# Altium PCB PCBRelais.PcbDoc
Units mil, origin at the board's own origin, x right, y up, seen from the top; angles counter-clockwise.
Board outline 6330 x 8490 mil, 2 copper layers (Top Layer, Bottom Layer), stack 21 mil thick; 27 components, 55 nets, 124 pads, 4 vias.
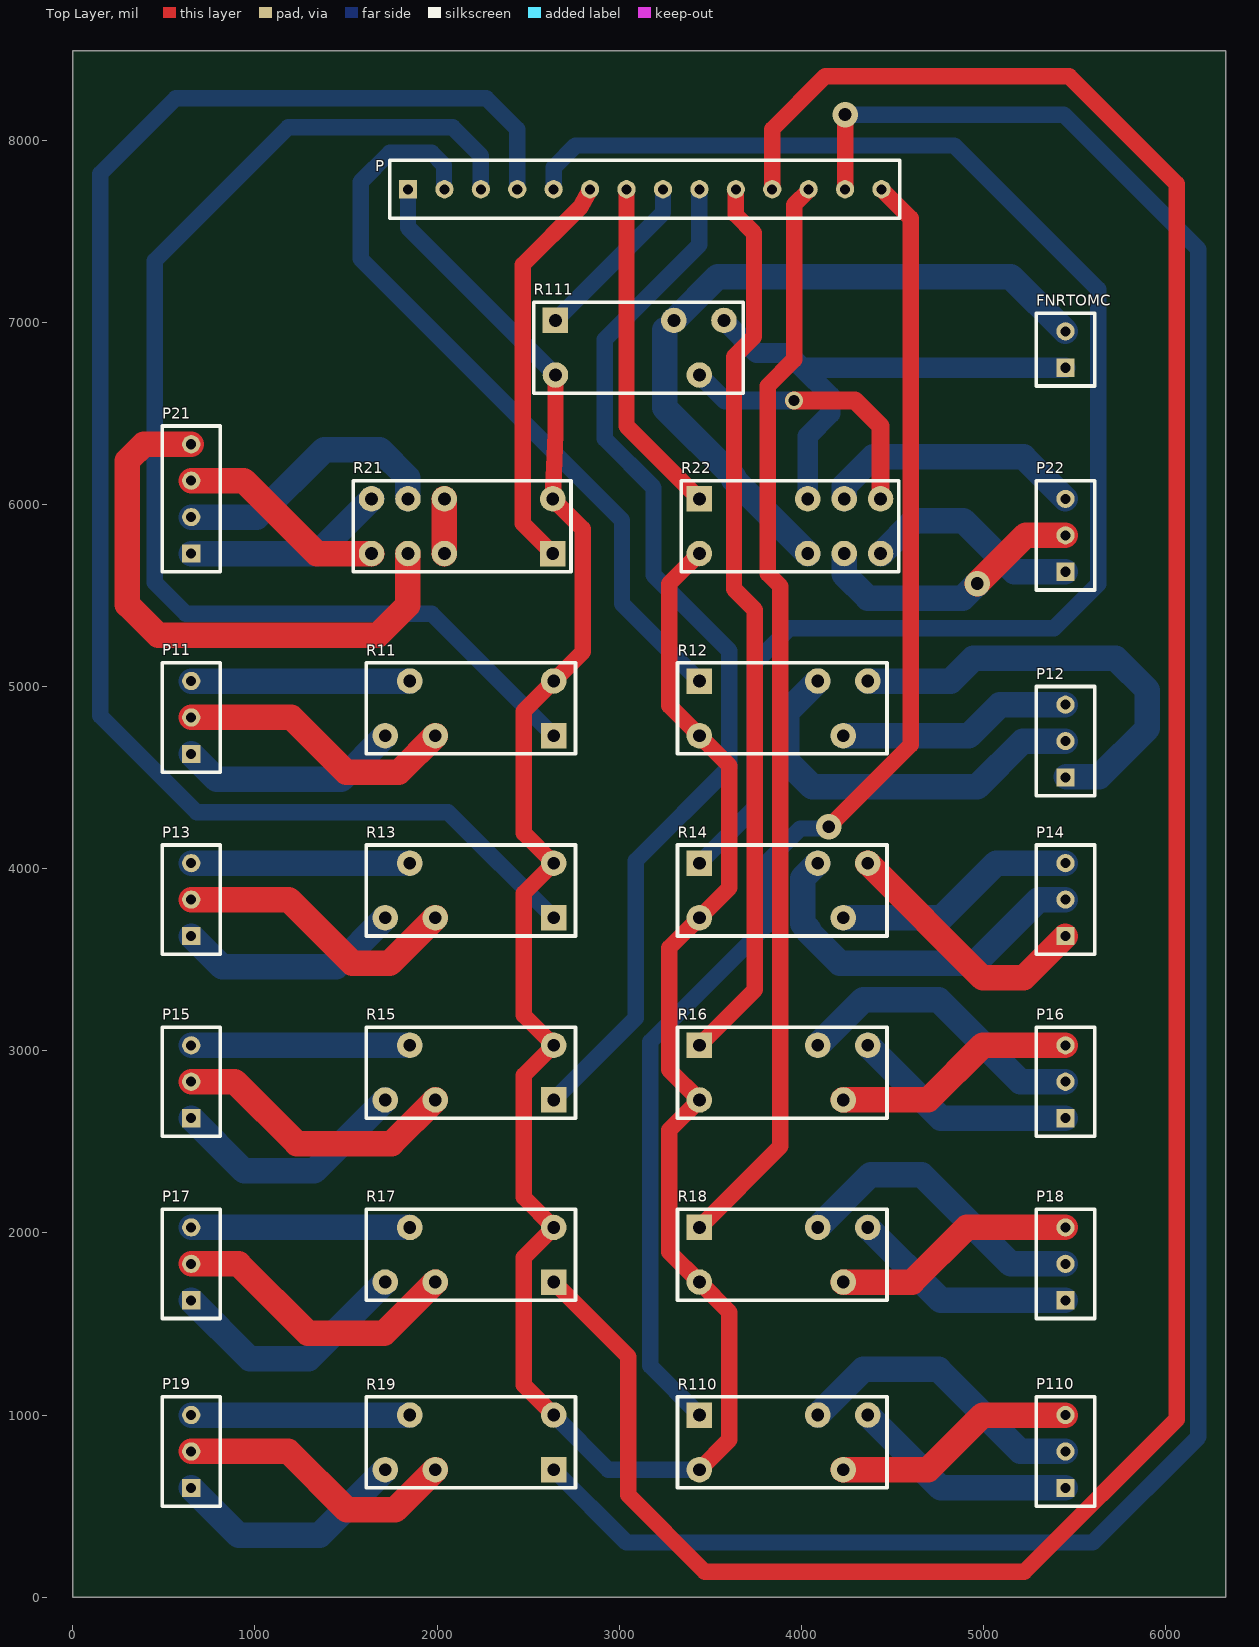
[diagram p0: Top Layer view]
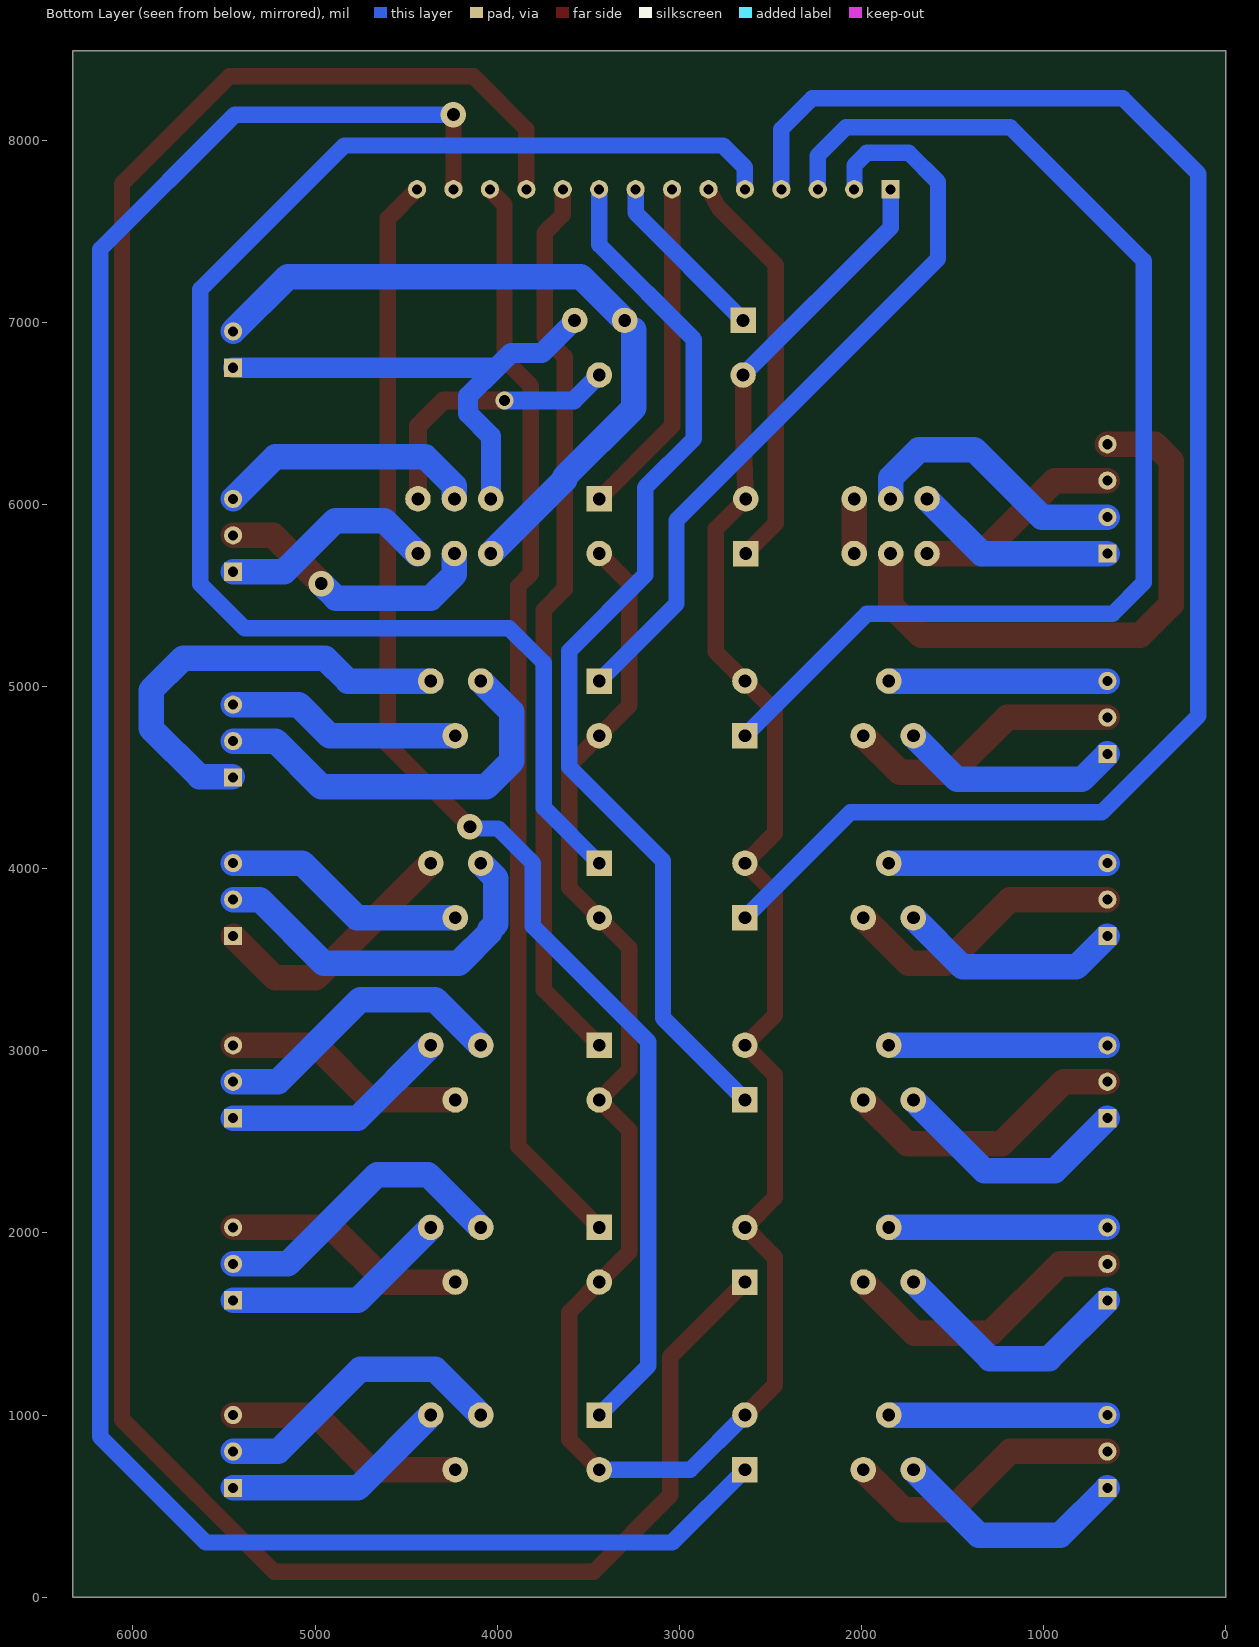
[diagram p1: Bottom Layer view, seen from below]

## Layer stack, top to bottom
Top Solder: solder mask 1, Solder Resist, Dk 3.5
Top Layer: signal copper 3
Dielectric 1: dielectric 15, FR-4, Dk 4.8
Bottom Layer: signal copper 3
Bottom Solder: solder mask 1, Solder Resist, Dk 3.5

## Board outline
0,0 6330,0 6330,8490 0,8490

## Design rules (kind name [scope] priority, off if disabled: settings)
Clearance [All] p1: gap=50 ignorepadtopadclearanceinfootprint=FALSE
PolygonConnect [All] p1: connectstyle=Relief reliefconductorwidth=10 reliefentries=4 polygonreliefangle="90 Angle" airgapwidth=10
RoutingVias [All] p1: holewidth=60 width=100 viastyle="Through Hole" minholewidth=60 minwidth=100 maxholewidth=60 maxwidth=100
SolderMaskExpansion [All] p1: expansion=4
Width [All] p1: maxlimit=150 minlimit=90 preferedwidth=90 minimp=50.000000 maximp=50.000000 favimp=50.000000
30 further rules are at their usual default settings.

## Components (designator, comment, footprint, x,y, rotation, side; value= is the part's Value field where it differs from the comment)
FNRTOMC "Header 2" HDR2 5450,6650 r90 top
P "MHDR1X14" HDR14 1740,7730 r0 top
P11 "Header 3" HDR3 650,4530 r90 top
P12 "Header 3" HDR3 5450,4400 r90 top
P13 "Header 3" HDR3 650,3530 r90 top
P14 "Header 3" HDR3 5450,3530 r90 top
P15 "Header 3" HDR3 650,2530 r90 top
P16 "Header 3" HDR3 5450,2530 r90 top
P17 "Header 3" HDR3 650,1530 r90 top
P18 "Header 3" HDR3 5450,1530 r90 top
P19 "Header 3" HDR3 650,500 r90 top
P21 "Header 4" HDR4 650,5630 r90 top
P22 "Header 3" HDR3 5450,5530 r90 top
P110 "Header 3" HDR3 5450,500 r90 top
R11 "OnePR" EENPOOL 2740,4730 r180 top
R12 "OnePR" EENPOOL 3340,5030 r0 top
R13 "OnePR" EENPOOL 2740,3730 r180 top
R14 "OnePR" EENPOOL 3340,4030 r0 top
R15 "OnePR" EENPOOL 2740,2730 r180 top
R16 "OnePR" EENPOOL 3340,3030 r0 top
R17 "OnePR" EENPOOL 2740,1730 r180 top
R18 "OnePR" EENPOOL 3340,2030 r0 top
R19 "OnePR" EENPOOL 2740,700 r180 top
R21 "TwoPR" TWEEPOOL 2735,5730 r180 top
R22 "TwoPR" TWEEPOOL 3340,6030 r0 top
R110 "OnePR" EENPOOL 3340,1000 r0 top
R111 "OnePR" EENPOOL 2550,7010 r0 top

## Footprints (in the part's own frame and the unit in brackets; to place one, negate y for a bottom-side part, rotate by r counter-clockwise, add the part's x,y. Pads: shape width x height; smd on the part's side, far side on the other; paste and mask are expansions set on the pad)
EENPOOL [mil]
  rect 140x140 hole 70: 1(100,0)
  round 140 hole 70: 2(100,-300) 3(890,-300) 4(750,0) 5(1025,0)
  silkscreen extent -20,-400 1130,100
HDR2 [mil]
  rect 100x100 hole 55: 1(100,0)
  round 100 hole 55: 2(300,0)
  silkscreen extent 0,-160 400,160
HDR3 [mil]
  rect 100x100 hole 55: 1(100,0)
  round 100 hole 55: 2(300,0) 3(500,0)
  silkscreen extent 0,-160 600,160
HDR4 [mil]
  rect 100x100 hole 55: 1(100,0)
  round 100 hole 55: 2(300,0) 3(500,0) 4(700,0)
  silkscreen extent 0,-160 800,160
HDR14 [mil]
  rect 100x100 hole 55: 1(100,0)
  round 100 hole 55: 2(300,0) 3(500,0) 4(700,0) 5(900,0) 6(1100,0) 7(1300,0) 8(1500,0) 9(1700,0) 10(1900,0) 11(2100,0) 12(2300,0) 13(2500,0) 14(2700,0)
  silkscreen extent 0,-160 2800,160
TWEEPOOL [mil]
  rect 140x140 hole 70: 1(100,0)
  round 140 hole 70: 2(100,-300) 3(695,0) 4(895,0) 5(1095,0) 6(695,-300) 7(895,-300) 8(1095,-300)
  silkscreen extent 0,-400 1195,100

## Part data
FNRTOMC: "Header, 2-Pin", LatestRevisionDate=17-Jul-2002, LatestRevisionNote="Re-released for DXP Platform.", Publisher="Altium Limited"
P: "Header, 14-Pin", LatestRevisionDate=17-Jul-2002, LatestRevisionNote="Re-released for DXP Platform.", Publisher="Altium Limited"
P11 P12 P13 P14 P15 P16 P17 P18 P19 P22 P110: "Header, 3-Pin", LatestRevisionDate=17-Jul-2002, LatestRevisionNote="Re-released for DXP Platform.", Publisher="Altium Limited"
P21: "Header, 4-Pin", LatestRevisionDate=17-Jul-2002, LatestRevisionNote="Re-released for DXP Platform.", Publisher="Altium Limited"
R11 R12 R13 R14 R15 R16 R17 R18 R19 R110 R111: library part R1
R21 R22: library part R2

## Via types
v1: diameter 140, hole 70, Top Layer to Bottom Layer, 3 vias
v2: diameter 100, hole 60, Top Layer to Bottom Layer, 1 vias

## Nets (pads, with @x,y where several pads share a name; then routed paths per layer and width w, separated by ;. In a path a pad name is that pad's centre, name@x,y a point inside that pad or via, vN(x,y) a via of type N, cw(c..) or ccw(c..) an arc to the next point about the centre after c; other vN are vias at no path point)
NetFNRTOMC_1: FNRTOMC.1 R22.3 R111.5 | length 2818.6
  Bottom Layer w110: R111.5 3755,6830 3925.08,6830 4005.08,6750 ; R22.3 4035,6374.68 4160,6499.68 4160,6595.08 4005.08,6750 ; FNRTOMC.1 4005.08,6750
NetFNRTOMC_2: FNRTOMC.2 R22.6 R111.4 | length 3999.5
  Bottom Layer w90: 3250,6960 R111.4
  Bottom Layer w140: 3250,6960 3250,6529.71 3630,6149.71 3630,6135 R22.6 ; R111.4 3540,7250 5150,7250 FNRTOMC.2
NetP11_1: P11.1 R11.5 | length 1222.4
  Bottom Layer w140: P11.1 790,4490 1475,4490 R11.5
NetP11_2: P11.2 R11.4 | length 1547.1
  Top Layer w140: P11.2 1200,4830 1500,4530 1790,4530 R11.4
NetP11_3: P11.3 R11.3 | length 1200
  Bottom Layer w140: P11.3 R11.3
NetP12_1: P12.1 R12.5 | length 2431.1
  Bottom Layer w90: P12.1 P12.1@5455,4505
  Bottom Layer w140: R12.5 4820,5030 4945,5155 5725,5155 5900,4980 5900,4770 5635,4505 P12.1@5455,4505
NetP12_2: P12.2 R12.4 | length 2202
  Bottom Layer w140: R12.4 3920,4860 3920,4590 4060,4450 4966,4450 5216,4700 P12.2
NetP12_3: P12.3 R12.3 | length 1290.4
  Bottom Layer w140: R12.3 4920,4730 5090,4900 P12.3
NetP13_1: P13.1 R13.5 | length 1247.3
  Bottom Layer w140: P13.1 820,3460 1445,3460 R13.5
NetP13_2: P13.2 R13.4 | length 1588.5
  Top Layer w140: P13.2 1185,3830 1535,3480 1740,3480 R13.4
NetP13_3: P13.3 R13.3 | length 1200
  Bottom Layer w140: P13.3 R13.3
NetP14_1: P14.1 R14.5 | length 1441.2
  Top Layer w140: R14.5 4995,3400 5220,3400 P14.1
NetP14_2: P14.2 R14.4 | length 2051.9
  Bottom Layer w140: R14.4 4008,3948 4008,3697 4040,3665 4040,3651.3 4211.3,3480 4953,3480 5303,3830 P14.2
NetP14_3: P14.3 R14.3 | length 1344.3
  Bottom Layer w140: R14.3 4770,3730 5070,4030 P14.3
NetP15_1: P15.1 R15.5 | length 1346.7
  Bottom Layer w140: P15.1 940,2340 1325,2340 R15.5
NetP15_2: P15.2 R15.4 | length 1580.2
  Top Layer w140: P15.2 890,2830 1230,2490 1750,2490 R15.4
NetP15_3: P15.3 R15.3 | length 1200
  Bottom Layer w140: P15.3 R15.3
NetP16_1: P16.1 R16.5 | length 1250.7
  Bottom Layer w140: R16.5 4765,2630 P16.1
NetP16_2: P16.2 R16.4 | length 1649.9
  Bottom Layer w140: R16.4 4340,3280 4753,3280 5203,2830 P16.2
NetP16_3: P16.3 R16.3 | length 1344.3
  Top Layer w140: R16.3 4695.41,2730 4995.41,3030 P16.3
NetP17_1: P17.1 R17.5 | length 1371.5
  Bottom Layer w140: P17.1 970,1310 1295,1310 R17.5
NetP17_2: P17.2 R17.4 | length 1613.4
  Top Layer w140: P17.2 910,1830 1290,1450 1710,1450 R17.4
NetP17_3: P17.3 R17.3 | length 1200
  Bottom Layer w140: P17.3 R17.3
NetP18_1: P18.1 R18.5 | length 1250.7
  Bottom Layer w140: R18.5 4765,1630 P18.1
NetP18_2: P18.2 R18.4 | length 1683.1
  Bottom Layer w140: R18.4 4380,2320 4660,2320 5150,1830 P18.2
NetP18_3: P18.3 R18.3 | length 1344.3
  Top Layer w140: R18.3 4608,1730 4908,2030 P18.3
NetP19_1: P19.1 R19.5 | length 1321.8
  Bottom Layer w140: P19.1 910,340 1355,340 R19.5
NetP19_2: P19.2 R19.4 | length 1563.7
  Top Layer w140: P19.2 1184,800 1504,480 1770,480 R19.4
NetP19_3: P19.3 R19.3 | length 1200
  Bottom Layer w140: P19.3 R19.3
NetP21_1: P21.1 R21.8 | length 1114.3
  Bottom Layer w140: P21.1 1340,5730 R21.8
NetP21_2: P21.2 R21.7 | length 1522.5
  Bottom Layer w140: P21.2 1010,5930 1380,6300 1685,6300 1840,6145 R21.7
NetP21_3: P21.3 R21.5 | length 1155.7
  Top Layer w140: P21.3 939.59,6130 1339.59,5730 R21.5
NetP21_4: P21.4 R21.4 | length 3139.9
  Top Layer w140: P21.4 390,6330 300,6240 300,5450 470,5280 1673,5280 1840,5447 R21.4
NetP22_1: P22.1 R22.8 | length 1205.5
  Bottom Layer w140: R22.8 4439.47,5730 4619.47,5910 4890,5910 5170,5630 P22.1
NetP22_2: P22.2 R22.7 | length 1526.8
  Top Layer w140: v1(4966,5565) 5231,5830 P22.2
  Bottom Layer w140: R22.7 4235,5615 4365,5485 4886,5485 v1(4966,5565)
NetP22_3: P22.3 R22.4 | length 1447.1
  Bottom Layer w140: R22.4 4235,6101 4394,6260 5220,6260 P22.3
NetP110_1: P110.1 R110.5 | length 1250.7
  Bottom Layer w140: R110.5 4765,600 P110.1
NetP110_2: P110.2 R110.4 | length 1649.9
  Bottom Layer w140: R110.4 4340,1250 4753,1250 5203,800 P110.2
NetP110_3: P110.3 R110.3 | length 1344.3
  Top Layer w140: R110.3 4695.41,700 4995.41,1000 P110.3
NetP_1: P.1 R11.2 R12.2 R13.2 R14.2 R15.2 R16.2 R17.2 R18.2 R19.2 R21.2 R22.2 R110.2 R111.2 | length 14384.9
  Top Layer w90: R19.2 2475,1165 2475,1865 R17.2 2475,2195 2475,2865 R15.2 2475,3195 2475,3865 R13.2 2475,4195 2475,4865 R11.2 2800,5190 2800,5865 R21.2 2650,6385 R111.2 ; R110.2 3605,865 3605,1565 R18.2 3275,1895 3275,2565 R16.2 3275,2895 3275,3565 R14.2 3605,3895 3605,4565 R12.2 3275,4895 3275,5565 R22.2
  Bottom Layer w90: P.1 1840,7520 R111.2 ; R19.2 2940,700 R110.2
NetP_2: P.2 R12.1 | length 4195.7
  Bottom Layer w90: P.2 2038.09,7731.91 2038.09,7861.91 1970,7930 1740,7930 1580,7770 1580,7348 3015.34,5912.66 3015.34,5454.66 R12.1
NetP_3: P.3 R11.1 | length 6647.2
  Bottom Layer w90: P.3 2240,7915 2085,8070 1183,8070 450,7337 450,5571 621,5400 1970,5400 R11.1
NetP_4: P.4 R13.1 | length 8787.1
  Bottom Layer w90: P.4 2440,8060 2270,8230 565,8230 150,7815 150,4840 680,4310 2060,4310 R13.1
NetP_5: P.5 R14.1 | length 8394.6
  Bottom Layer w90: P.5 2640,7850 2760,7970 4840,7970 5630,7180 5630,5563 5387,5320 3935,5320 3745,5130 3745,4335 R14.1
NetP_6: P.6 R21.1 | length 2212.9
  Top Layer w90: R21.1 2470,5895 2470,7315 2785,7630 P.6
NetP_7: P.7 R22.1 | length 1865.7
  Top Layer w90: P.7 3040,6430 R22.1
NetP_8: P.8 R111.1 | length 964.4
  Bottom Layer w90: R111.1 3240,7600 P.8
NetP_9: P.9 R15.1 | length 5898.8
  Bottom Layer w90: R15.1 3090,3180 3090,4043 3605,4558 3605,5195 3188,5612 3188,6092 2920,6360 2920,6905 3440,7425 P.9
NetP_10: P.10 R16.1 | length 4961
  Top Layer w90: R16.1 3745,3335 3745,5420 3630,5535 3630,6810 3740,6920 3740,7490 3640,7590 P.10
NetP_11: P.11 R17.1 | length 14568.8
  Top Layer w90: R17.1 3049,1321 3049,561 3470,140 5224.35,140 6060,975.65 6060,7760 5470,8350 4130,8350 3840,8060 P.11
NetP_12: P.12 R18.1 | length 6006.5
  Top Layer w90: R18.1 3885,2475 3885,5550 3815,5620 3815,6650 3960,6795 3960,7644.94 4040,7724.94 P.12
NetP_13: P.13 R19.1 | length 13122.4
  Top Layer w90: P.13 v1(4240,8140)
  Bottom Layer w90: R19.1 3040,300 5600,300 6180,880 6180,7400 5440,8140 v1(4240,8140)
NetP_14: P.14 R110.1 | length 7586
  Top Layer w90: v1(4150,4230) 4600,4680 4600,7570 P.14
  Bottom Layer w90: R110.1 3170,1270 3170,3050 3804,3684 3804,4030 3994.43,4220.43 4140.43,4220.43 v1(4150,4230)
NetR21_3: R21.3 R21.6 | length 300
  Top Layer w140: R21.3 R21.6
NetR22_5: R22.5 R111.3 | length 1511
  Top Layer w100: v2(3960,6570) 4295,6570 4435,6430 R22.5
  Bottom Layer w100: R111.3 3580,6570 v2(3960,6570)